# Altium PCB Grabber.PCBDOC (part 2 of 5)
Units mil, origin at the board's own origin, x right, y up, seen from the top; angles counter-clockwise.
Board outline 2854.33 x 3937 mil, 4 copper layers (TopLayer, Internal Plane 2, Layer 1, Bottom Layer), stack 60.752 mil thick; 159 components, 116 nets, 684 pads, 241 vias.
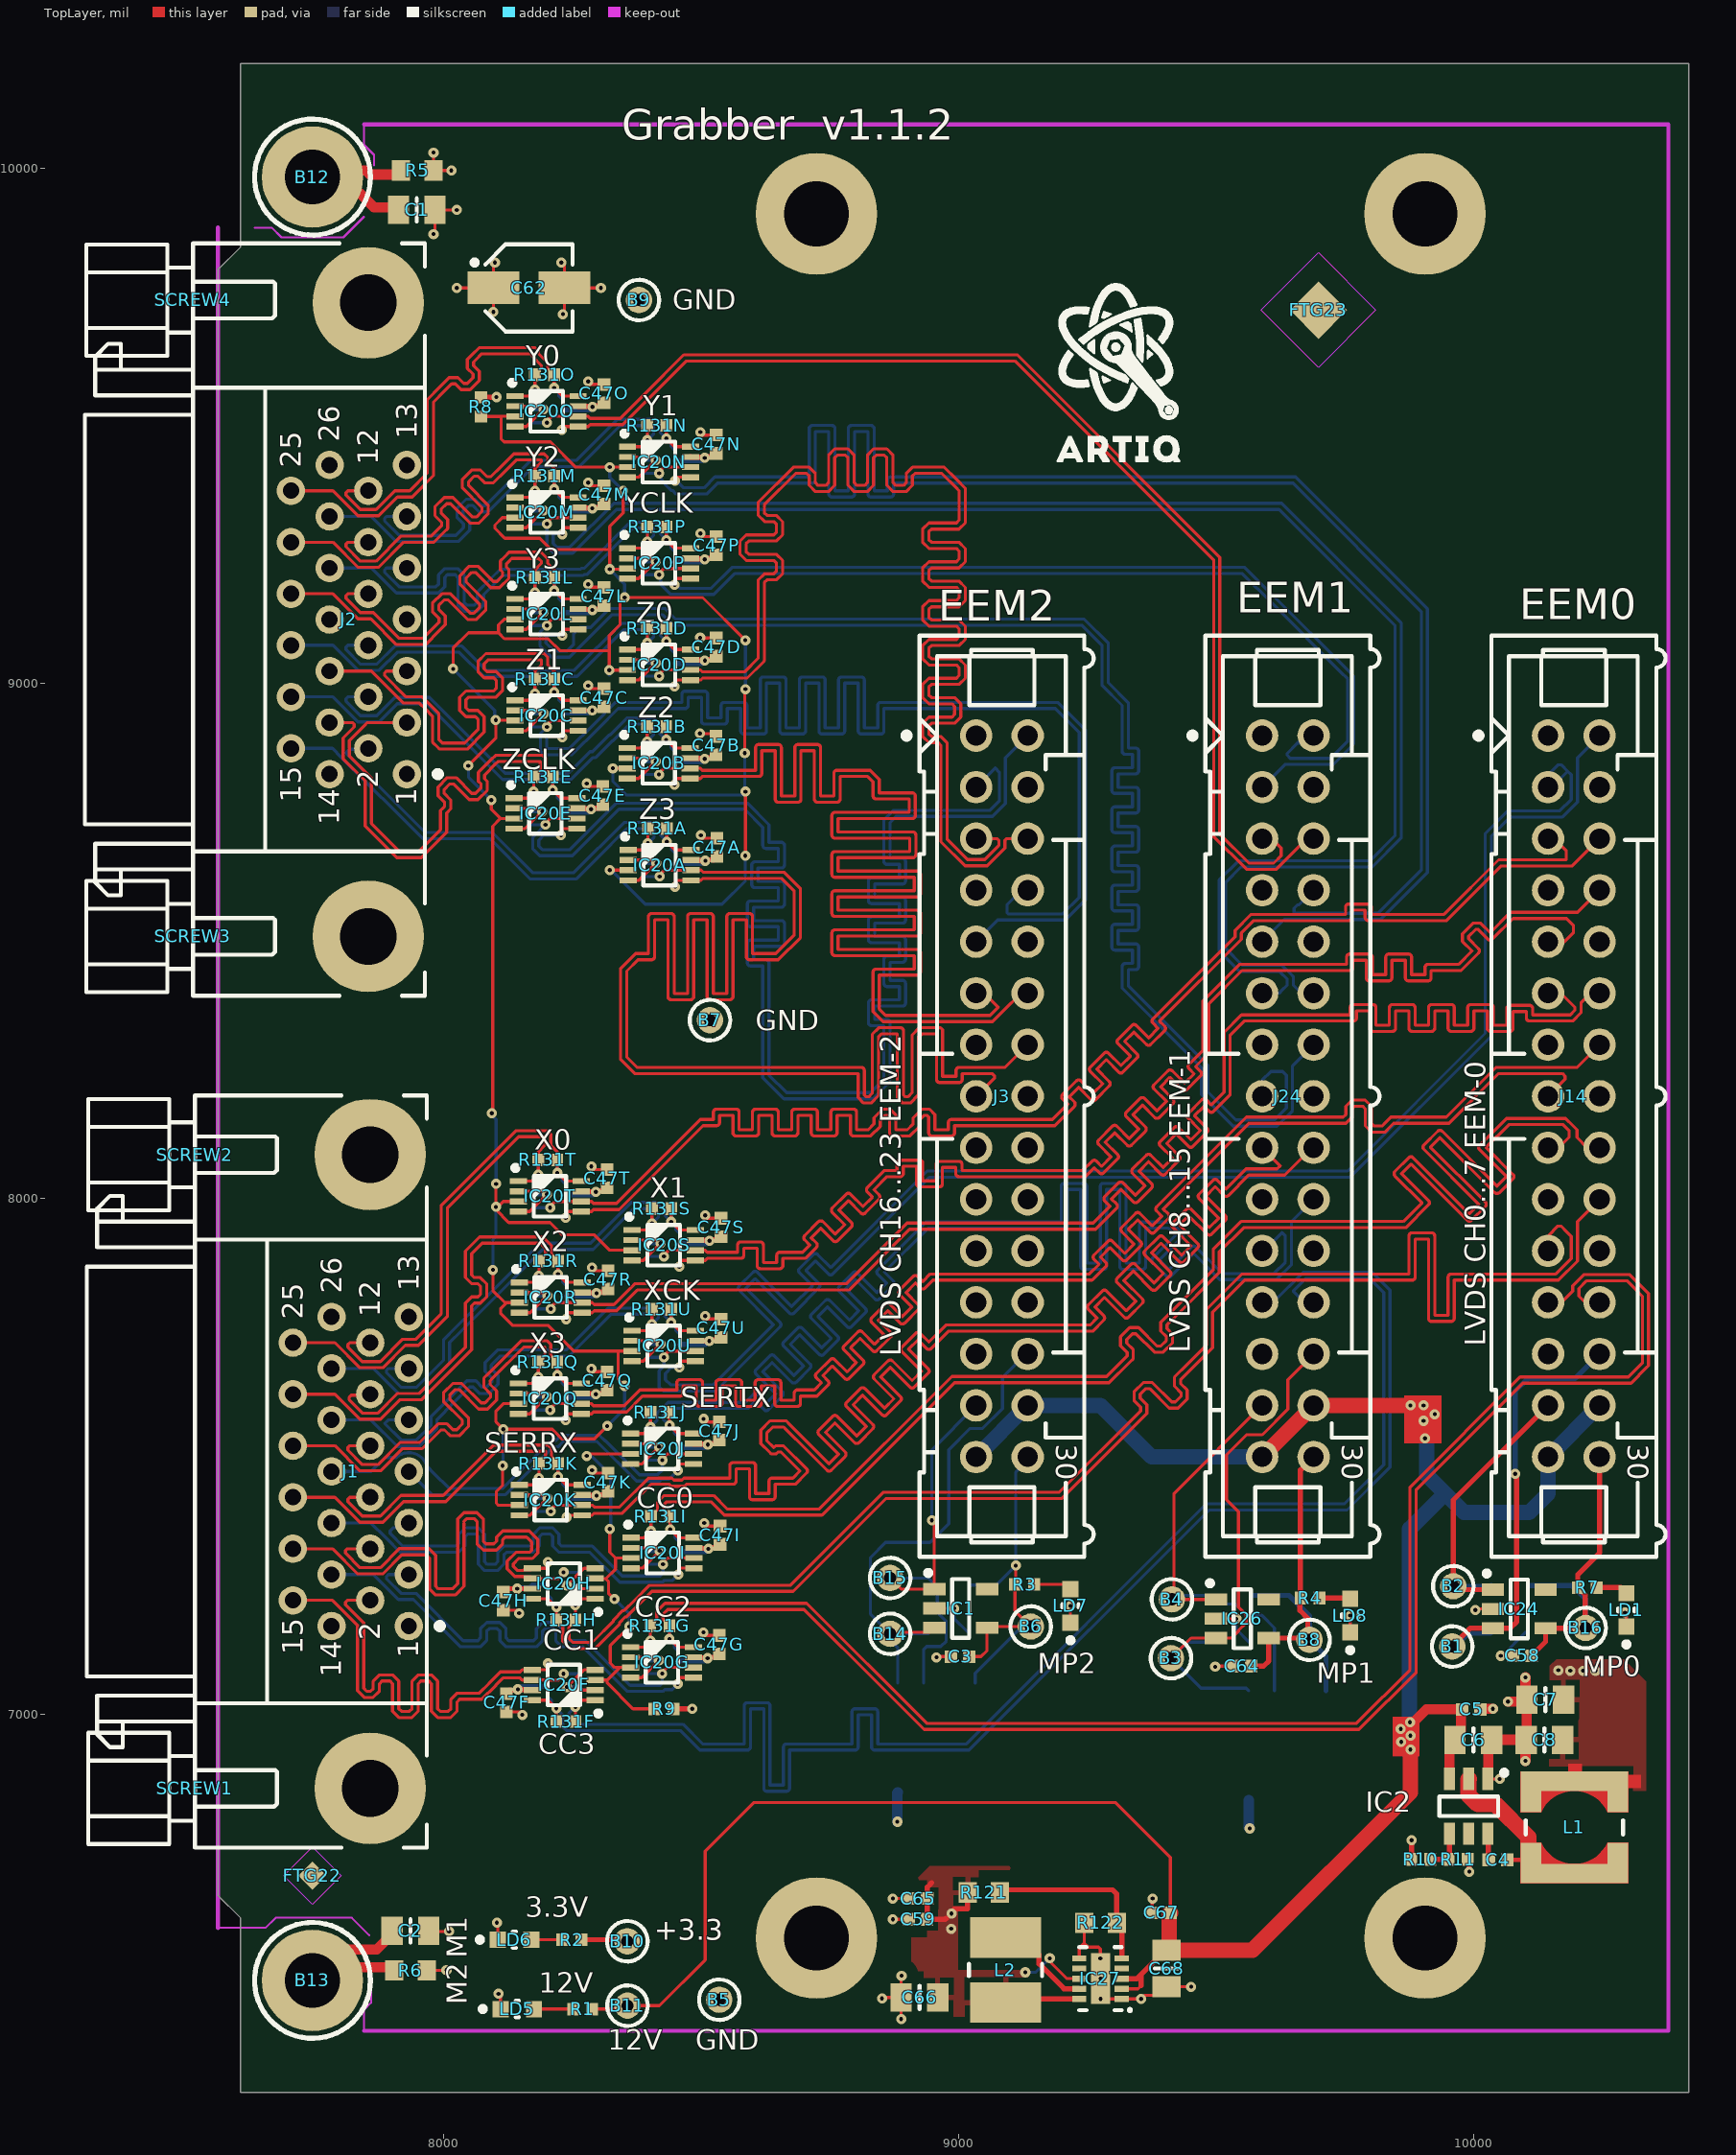
[diagram p0: TopLayer view]

## Via types
v1: diameter 19.68, hole 7.87, TopLayer to Bottom Layer, tented both sides, 241 vias

## Nets (pads, with @x,y where several pads share a name; then routed paths per layer and width w, separated by ;. In a path a pad name is that pad's centre, name@x,y a point inside that pad or via, vN(x,y) a via of type N, cw(c..) or ccw(c..) an arc to the next point about the centre after c; other vN are vias at no path point) (continued)
CC0_N: (continued)
  Bottom Layer w6: J1.18@7782.97,7370.72 7859.67,7370.72 7888.14,7342.26 7916.4,7314 8018.58,7314 8030.06,7314 8042.23,7326.17 8042.23,7344.3 8047.37,7349.43 8062.78,7349.43 8067.91,7344.3 8067.91,7290.73 8080.08,7278.57 8105.43,7278.57 8117.6,7290.73 8117.6,7308.86 8122.74,7314 8160.13,7314 8162.94,7314 8174.43,7314 8186.6,7326.17 8186.6,7344.3 8191.73,7349.43 8207.14,7349.43 8212.28,7344.3 8212.28,7326.17 8224.45,7314 8278.36,7314 8284.1,7314 8338.81,7259.29 8342.33,7255.77 8425.48,7255.77 8429,7259.29 8444.72,7259.29 v1(8456.12,7270.69) 8456.79,7271.35 D1I.6@8456.79,7295.92
CC0_P: D1I.1 IC20I.6 J1.5 | length 893.8
  TopLayer w6: v1(8426.12,7290.69) 8426.12,7293.4 8435.53,7302.81 IC20I.6@8486.71,7302.81
  Bottom Layer w6: J1.5@7932.97,7370.72 7923.57,7361.33 7902.24,7361.33 7896.62,7355.71 7896.62,7350.74 7921.37,7326 8018.58,7326 8025.09,7326 8030.23,7331.14 8030.23,7349.27 8042.4,7361.43 8067.75,7361.43 8079.91,7349.27 8079.91,7295.7 8085.05,7290.57 8100.46,7290.57 8105.6,7295.7 8105.6,7313.83 8117.77,7326 8160.13,7326 8162.94,7326 8169.46,7326 8174.6,7331.14 8174.6,7349.27 8186.76,7361.43 8212.11,7361.43 8224.28,7349.27 8224.28,7331.14 8229.42,7326 8278.36,7326 8289.07,7326 8347.3,7267.77 8420.51,7267.77 8426.12,7273.38 v1(8426.12,7290.69) 8399.82,7290.69 D1I.1@8394.58,7295.92
CC1_N: D1H.6 IC20H.5 J1.4 | length 924.4
  TopLayer w6: J1.4@7857.97,7320.72 7813.64,7320.72 7810.13,7317.21 7810.13,7312.24 7838.2,7284.17 7877.74,7284.17 7914.38,7320.81 7972.06,7320.81 7985.09,7307.78 7985.09,7248.07 7990.06,7243.1 8018.03,7243.1 8027.81,7252.88 8027.81,7360.68 8027.81,7369.74 8027.81,7378.8 8039.97,7390.97 8065.33,7390.97 8077.49,7378.8 8077.49,7335.45 8082.63,7330.31 8098.04,7330.31 8103.18,7335.45 8103.18,7343.37 8115.34,7355.54 8126.83,7355.54 8166.5,7355.54 8183.38,7338.67 8183.38,7312.54 8172.83,7302 8146.26,7302 8135.75,7291.48 8135.75,7286.51 8143.41,7278.85 8155.41,7278.85 8156.34,7279.79 8169.75,7279.79 IC20H.5@8172.65,7282.69 8199.22,7282.69 8203.24,7286.72 v1(8203.24,7295.13)
  Bottom Layer w6: D1H.6@8202.57,7269.9 8202.57,7294.46 v1(8203.24,7295.13)
CC1_P: D1H.1 IC20H.6 J1.17 | length 1011.4
  TopLayer w6: J1.17@7707.97,7320.72 7784.67,7320.72 7833.23,7272.17 7882.71,7272.17 7919.35,7308.81 7967.09,7308.81 7973.09,7302.81 7973.09,7243.1 7985.09,7231.1 8023,7231.1 8039.81,7247.9 8039.81,7369.74 ; 8039.81,7373.83 8044.94,7378.97 8060.35,7378.97 8065.49,7373.83 8065.49,7330.48 8077.66,7318.31 8103.01,7318.31 8115.18,7330.48 8115.18,7338.4 8120.31,7343.54 8126.83,7343.54 8161.53,7343.54 8162.89,7342.18 8171.38,7333.7 8171.38,7317.51 8167.86,7314 8141.29,7314 8123.75,7296.45 8123.75,7281.54 8138.44,7266.85 8155.41,7266.85 8156.34,7265.91 8169.75,7265.91 IC20H.6@8172.65,7263.01 8223.83,7263.01 8233.24,7272.42 v1(8233.24,7275.13)
  Bottom Layer w6: v1(8233.24,7275.13) 8259.54,7275.13 D1H.1@8264.78,7269.9
CC2_N: D1G.6 IC20G.5 J1.16 | length 939
  TopLayer w6: v1(8454.74,7058.36) 8454.74,7066.78 8458.76,7070.8 IC20G.5@8485.33,7070.8
  Bottom Layer w6: J1.16@7782.97,7270.72 7864.3,7270.72 7912.85,7222.17 7941.83,7222.17 7955.08,7208.91 7963.57,7200.43 8033.55,7130.45 8060.35,7130.45 8071.84,7130.45 8084.01,7142.62 8084.01,7160.75 8089.14,7165.88 8104.56,7165.88 8109.69,7160.75 8109.69,7142.62 8121.86,7130.45 8168.8,7130.45 8180.28,7130.45 8192.45,7142.62 8192.45,7160.75 8197.58,7165.88 8213,7165.88 8218.13,7160.75 8218.13,7142.62 8230.3,7130.45 8264.78,7130.45 8270.8,7130.45 8353.77,7047.48 8357.29,7043.96 8425.93,7043.96 8429.45,7047.48 8443.85,7047.48 v1(8454.74,7058.36) 8455.41,7059.03 D1G.6@8455.41,7083.6
CC2_P: D1G.1 IC20G.6 J1.3 | length 892.4
  TopLayer w6: v1(8424.74,7078.36) 8424.74,7081.08 8434.15,7090.49 IC20G.6@8485.33,7090.49
  Bottom Layer w6: J1.3@7932.97,7270.72 7893.27,7270.72 7889.75,7267.21 7889.75,7262.24 7917.83,7234.17 7946.8,7234.17 8038.52,7142.45 8060.35,7142.45 8066.87,7142.45 8072.01,7147.59 8072.01,7165.72 8084.17,7177.88 8109.53,7177.88 8121.69,7165.72 8121.69,7147.59 8126.83,7142.45 8168.8,7142.45 8175.31,7142.45 8180.45,7147.59 8180.45,7165.72 8192.61,7177.88 8217.97,7177.88 8230.13,7165.72 8230.13,7147.59 8235.27,7142.45 8264.78,7142.45 8275.77,7142.45 8362.26,7055.96 8420.96,7055.96 8424.74,7059.74 v1(8424.74,7078.36) 8398.44,7078.36 D1G.1@8393.2,7083.6
CC3_N: D1F.6 IC20F.5 J1.2 | length 875.1
  TopLayer w6: J1.2@7857.97,7220.72 7813.64,7220.72 7810.13,7217.21 7810.13,7212.24 7845.31,7177.06 7845.31,7079 7845.31,7050.27 7851.41,7044.18 7858.67,7044.18 7863.81,7049.31 7863.81,7063.83 7875.97,7076 7901.33,7076 7913.49,7063.83 7913.49,7010.27 7918.63,7005.13 7934.04,7005.13 7939.18,7010.27 7939.18,7063.83 7951.34,7076 7976.7,7076 7988.86,7063.83 7988.86,7010.27 7994,7005.13 8009.41,7005.13 8014.55,7010.27 8014.55,7028.4 8026.71,7040.57 8064.84,7040.57 8069.83,7040.57 8089.25,7059.99 8089.25,7060.49 8110.77,7082 8149.08,7082 8152.92,7085.84 IC20F.5@8172.65,7085.84 8199.22,7085.84 8203.24,7089.87 v1(8203.24,7098.28)
  Bottom Layer w6: D1F.6@8202.57,7073.05 8202.57,7097.61 v1(8203.24,7098.28)
CC3_P: D1F.1 IC20F.6 J1.15 | length 966.2
  TopLayer w6: J1.15@7707.97,7220.72 7784.67,7220.72 7833.31,7172.09 7833.31,7045.3 7839.92,7038.69 7846.44,7032.18 7863.64,7032.18 7875.81,7044.34 7875.81,7058.86 7880.94,7064 7896.36,7064 7901.49,7058.86 7901.49,7005.3 7913.66,6993.13 7939.01,6993.13 7951.18,7005.3 7951.18,7058.86 7956.31,7064 7971.73,7064 7976.86,7058.86 7976.86,7005.3 7989.03,6993.13 8014.38,6993.13 8026.55,7005.3 8026.55,7023.43 8031.68,7028.57 8064.84,7028.57 8074.8,7028.57 8101.25,7055.02 8101.25,7055.52 8115.74,7070 8149.08,7070 8152.92,7066.16 IC20F.6@8172.65,7066.16 8223.83,7066.16 8233.24,7075.57 v1(8233.24,7078.28)
  Bottom Layer w6: v1(8233.24,7078.28) 8259.54,7078.28 D1F.1@8264.78,7073.05